# Altium PCB HLK-AX3000-KIT.PcbDoc (part 3 of 3)
Units mm, origin at the board's own origin, x right, y up, seen from the top; angles counter-clockwise.
Board outline 152 x 109 mm, 2 copper layers (Top Layer, Bottom Layer), stack 0.325 mm thick; 227 components, 273 nets, 847 pads, 829 vias.
Unrouted connection lines stored in the file: 195.
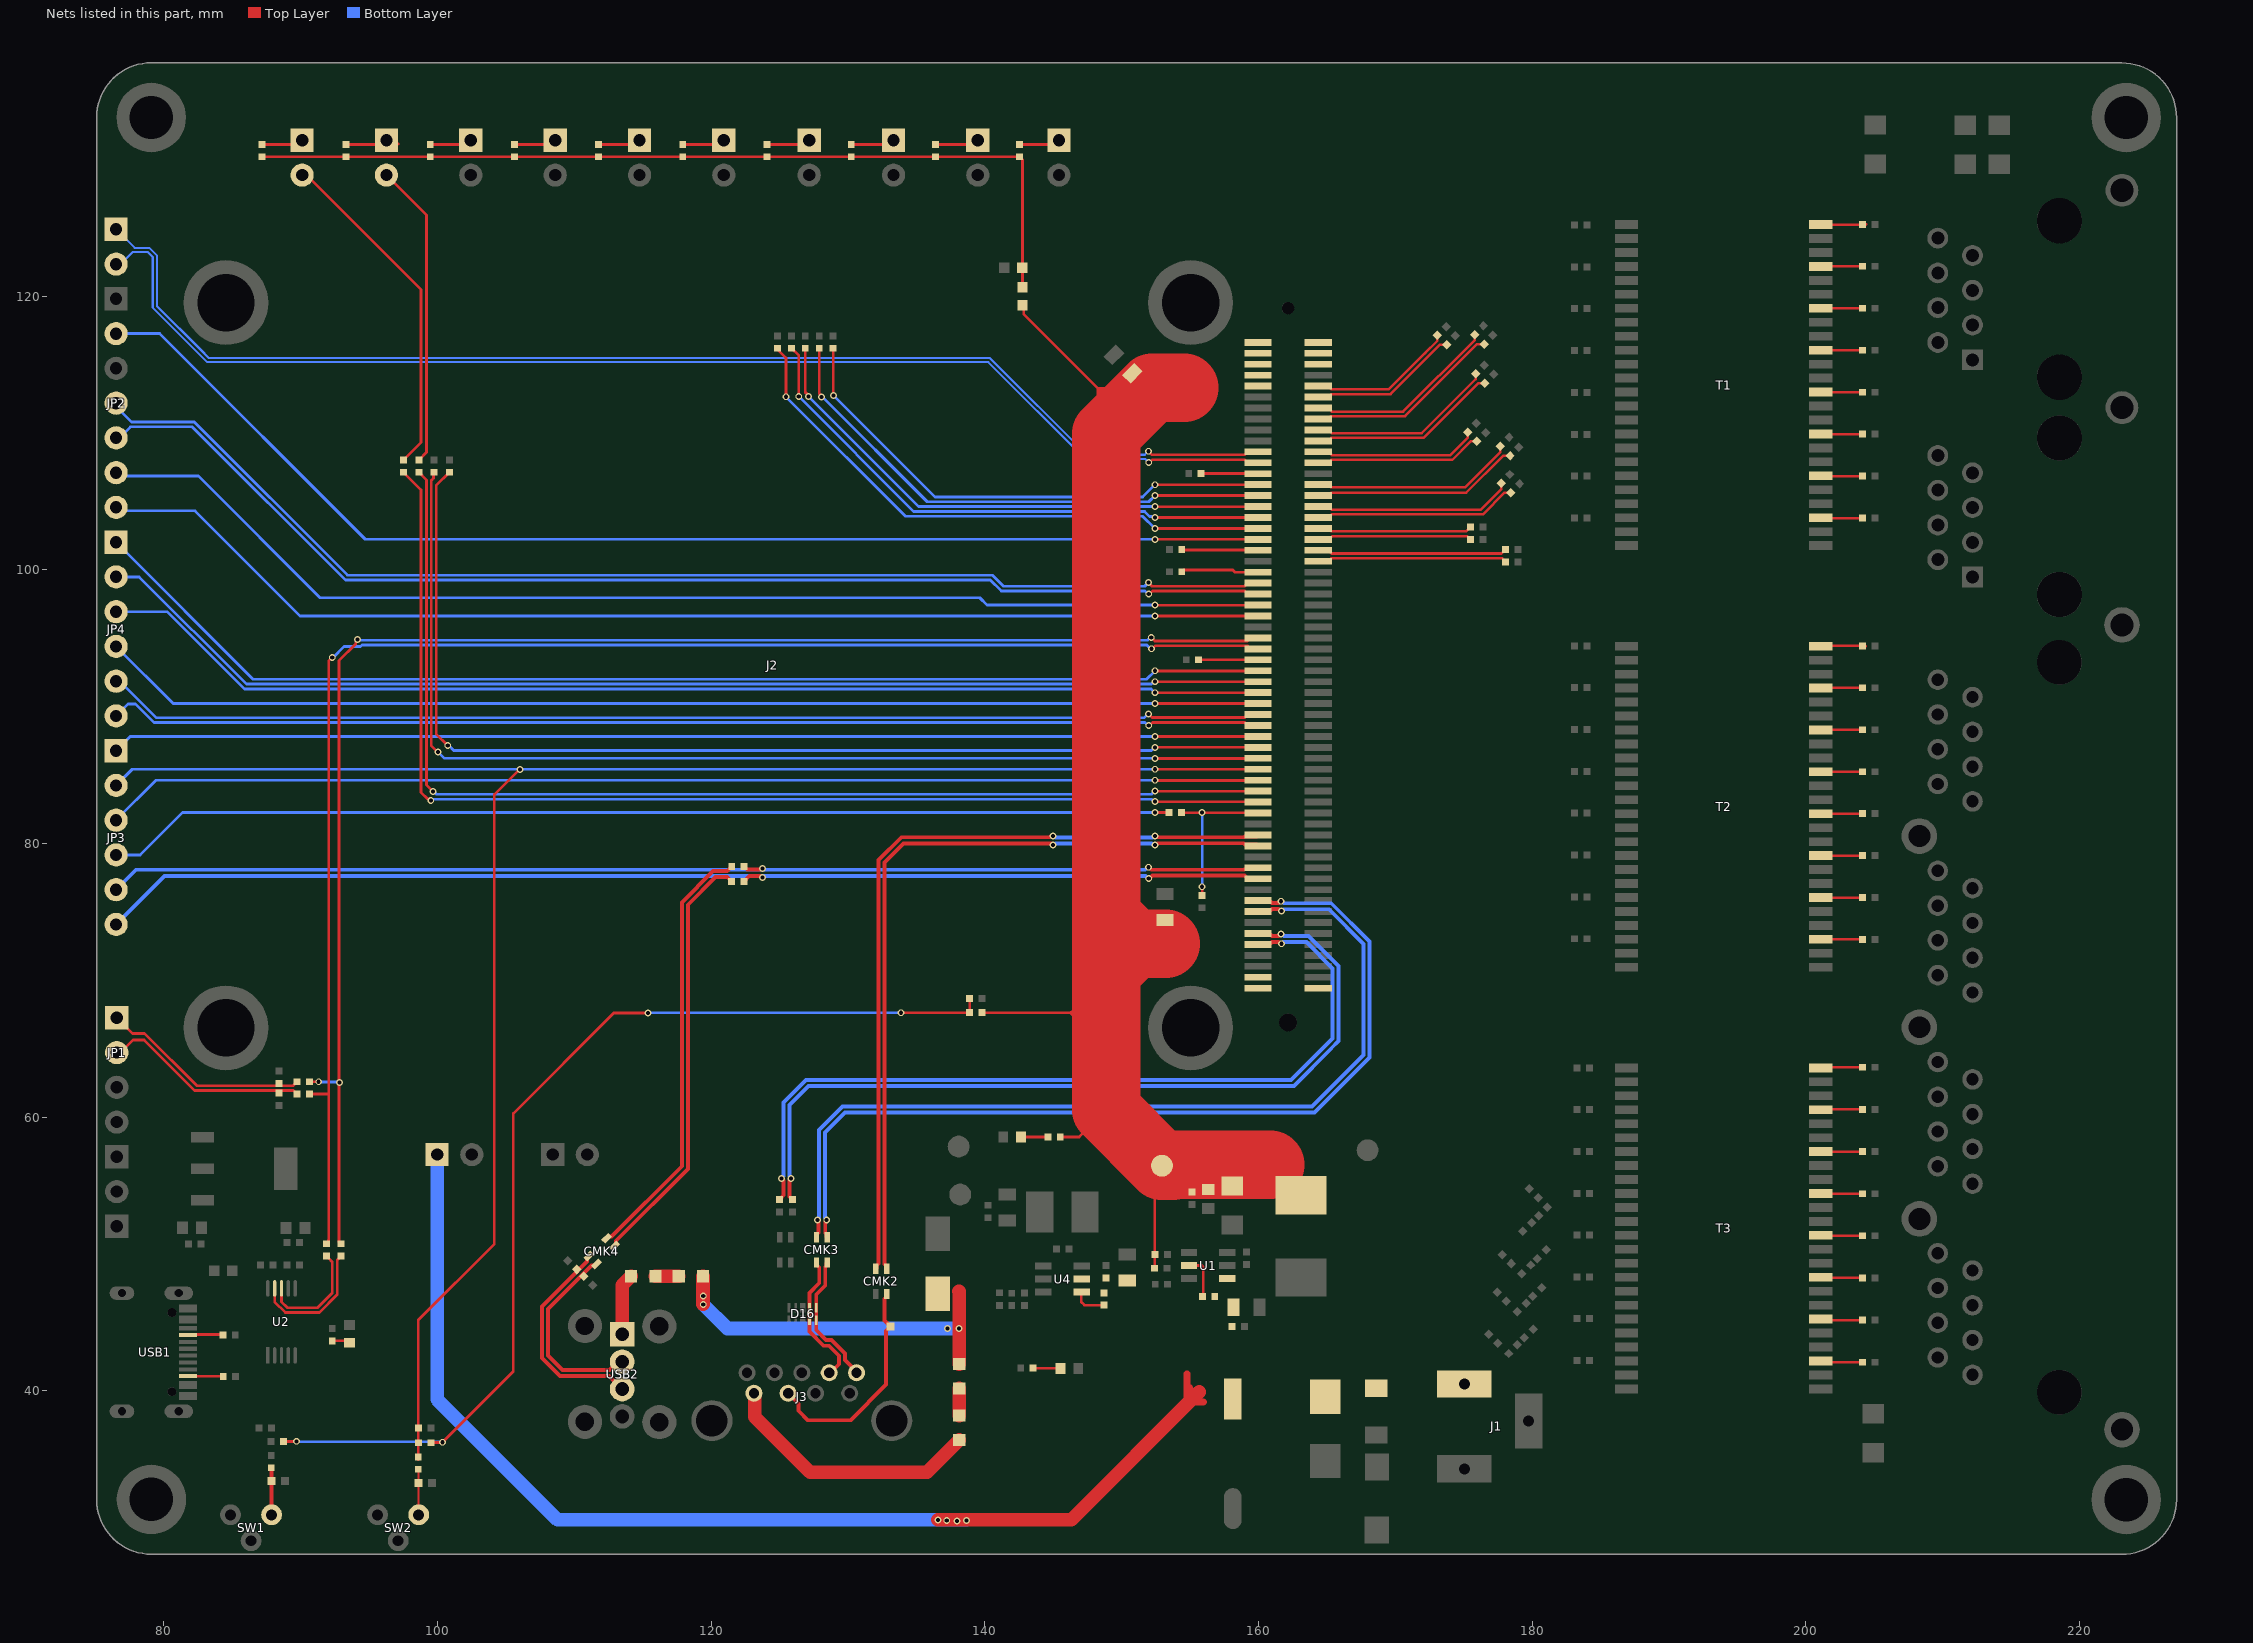
[diagram p3: the nets of this part, all layers, seen from the top]

## Via types
v1: diameter 0.5, hole 0.3, Top Layer to Bottom Layer, tented both sides, 829 vias

## Nets (pads, with @x,y where several pads share a name; then routed paths per layer and width w, separated by ;. In a path a pad name is that pad's centre, name@x,y a point inside that pad or via, vN(x,y) a via of type N, cw(c..) or ccw(c..) an arc to the next point about the centre after c; other vN are vias at no path point) (continued)
NetCMK2_2: CMK2.2 D18.2 J3.2 | length 16.3
  Top Layer w0.283: J3.2@125.623,39.82 126.387,39.055 126.387,38.541 127.085,37.844 130.169,37.844 132.775,40.449 132.775,44.39 D18.2@133.094,44.709 132.672,45.131 132.672,46.727 132.837,46.892 CMK2.2@132.837,47.067
NetCMK3_3: CMK3.3 D16.2 D16.9 J3.6 | length 9.9
  Top Layer w0.283: CMK3.3@127.694,49.378 127.752,49.32 127.752,49.145 127.895,49.002 127.895,47.87 127.178,47.152 D16.2@127.178,46.063 D16.9@127.178,45.163 127.178,44.329 128.218,43.289 128.603,43.289 129.334,42.558 129.334,41.943 128.711,41.32 J3.6@128.623,41.32
NetCMK3_4: CMK3.4 D16.1 D16.10 J3.5 | length 9.8
  Top Layer w0.283: CMK3.4@128.493,49.378 128.435,49.32 128.435,49.145 128.331,49.041 128.331,47.689 127.678,47.036 D16.1@127.678,46.063 D16.10@127.678,45.163 127.678,44.445 128.398,43.725 128.784,43.725 129.77,42.739 129.77,42.252 130.623,41.399 J3.5@130.623,41.32
NetCMK4_1: CMK4.1 D22.2 USB2.3 | length 15.6
  Top Layer w0.283: CMK4.1@111.054,49.84 110.931,49.717 110.931,49.444 107.642,46.155 107.642,42.393 108.342,41.693 108.957,41.078 112.541,41.078 USB2.3@113.49,40.128
NetCMK4_2: CMK4.2 D21.2 USB2.2 | length 14.4
  Top Layer w0.283: CMK4.2@111.62,49.275 111.496,49.151 111.254,49.151 108.077,45.975 108.077,42.574 108.522,42.128 109.138,41.513 112.566,41.513 113.182,42.128 USB2.2@113.49,42.128
NetD4_1: D4.1 R13.1 | length 3
  Top Layer w0.2: R13.1@142.537,131.086 145.112,131.086 D4.1@145.414,131.387
NetD5_1: D5.1 R17.1 | length 3.2
  Top Layer w0.2: R17.1@136.384,131.086 139.186,131.086 D5.1@139.487,131.387
NetD6_1: D6.1 R20.1 | length 3.2
  Top Layer w0.2: R20.1@130.231,131.086 133.021,131.086 D6.1@133.323,131.387
NetD7_2: D7.2 R19.1 SW1.2 | length 3.4
  Top Layer w0.3: R19.1@87.85,34.371 87.862,34.359 87.862,30.952 SW1.2@87.875,30.94
NetD8_1: D8.1 R23.1 | length 3.2
  Top Layer w0.2: R23.1@124.078,131.086 126.857,131.086 D8.1@127.158,131.387
NetD9_1: D9.1 R26.1 | length 3.1
  Top Layer w0.2: R26.1@117.925,131.086 120.624,131.086 D9.1@120.925,131.387
NetD10_1: D10.1 R31.1 | length 3.1
  Top Layer w0.2: R31.1@111.772,131.086 114.459,131.086 D10.1@114.761,131.387
NetD11_1: D11.1 R34.1 | length 3.1
  Top Layer w0.2: R34.1@105.618,131.086 108.295,131.086 D11.1@108.596,131.387
NetD12_2: D12.2 R30.1 SW2.2 | length 3.3
  Top Layer w0.178: SW2.2@98.606,31.001 R30.1@98.606,34.254
NetD13_1: D13.1 R35.1 | length 3.1
  Top Layer w0.2: R35.1@99.465,131.086 102.13,131.086 D13.1@102.432,131.387
NetD14_1: D14.1 R36.1 | length 3.8
  Top Layer w0.2: R36.1@93.312,131.086 97.082,131.086 97.134,131.138
NetD15_1: D15.1 R37.1 | length 3.1
  Top Layer w0.2: R37.1@87.159,131.086 89.801,131.086 D15.1@90.102,131.387
NetD19_2: D19.2 JP1.1 R3.1 | length 15.4
  Top Layer w0.2: JP1.1@76.556,67.259 77.699,66.116 78.588,66.116 82.401,62.303 88.397,62.303 89.453,62.303 R3.1@89.739,62.59
NetD20_2: D20.2 JP1.2 R4.1 | length 15.2
  Top Layer w0.2: JP1.2@76.556,64.719 76.822,64.719 77.736,65.634 78.562,65.634 82.245,61.951 88.4,61.951 89.479,61.951 R4.1@89.739,61.69
NetF1_1: F1.1 J3.1 | length 19.4
  Top Layer w1: J3.1@123.123,39.82 123.171,39.772 123.171,38.105 127.229,34.047 135.772,34.047 F1.1@138.131,36.406
NetF1_2: F1.2 FB1.2 | length 2
  Top Layer w1: F1.2@138.131,38.184 FB1.2@138.131,40.169
NetF2_1: F2.1 J1.1
NetF3_1: F3.1 USB2.1 | length 4.5
  Top Layer w1: USB2.1@113.49,44.128 113.49,47.713 F3.1@114.145,48.368
NetF3_2: F3.2 FB2.2 | length 1.7
  Top Layer w1: F3.2@115.923,48.368 FB2.2@117.625,48.368
NetJ2_9: J2.9 R74.1 | length 10.7
  Top Layer w0.188: J2.9@164.357,113.423 165.107,113.423 165.348,113.181 169.514,113.181 172.171,115.839 173.071,116.739 R74.1@173.071,117.139
NetJ2_11: J2.11 R75.1 | length 11
  Top Layer w0.188: J2.11@164.357,112.623 165.107,112.623 165.325,112.841 169.655,112.841 173.27,116.457 R75.1@173.754,116.457
NetJ2_13: J2.13 R76.1 | length 14.1
  Top Layer w0.188: J2.13@164.357,111.823 165.107,111.823 165.364,111.566 170.565,111.566 175.803,116.803 R76.1@175.803,117.187
NetJ2_15: J2.15 R77.1 | length 14.4
  Top Layer w0.188: J2.15@164.357,111.023 165.107,111.023 165.309,111.225 170.706,111.225 175.971,116.49 R77.1@176.488,116.49
NetJ2_17: J2.17 R78.1 | length 13.7
  Top Layer w0.188: J2.17@164.357,110.223 165.107,110.223 165.349,109.981 171.928,109.981 175.872,113.925 R78.1@175.872,114.329
NetJ2_19: J2.19 R79.1 | length 13.9
  Top Layer w0.188: J2.19@164.357,109.423 165.107,109.423 165.324,109.64 172.069,109.64 176.076,113.648 R79.1@176.54,113.648
NetJ2_21: J2.21 R80.1 | length 12
  Top Layer w0.188: J2.21@164.357,108.623 165.107,108.623 165.352,108.378 174.015,108.378 175.28,109.644 R80.1@175.28,110.068
NetJ2_23: J2.23 R81.1 | length 12.2
  Top Layer w0.188: J2.23@164.357,107.823 165.107,107.823 165.322,108.038 174.156,108.038 175.502,109.384 R81.1@175.958,109.384
NetJ2_26: J2.26 R6.2 | length 4.2
  Top Layer w0.2: R6.2@155.804,107.036 155.81,107.029 159.951,107.029 J2.26@159.957,107.023
NetJ2_27: J2.27 R82.1 | length 14.9
  Top Layer w0.188: J2.27@164.357,106.223 165.107,106.223 165.309,106.021 175.08,106.021 177.667,108.608 R82.1@177.667,109.041
NetJ2_28: J2.28 R7.2 | length 38.2
  Top Layer w0.2: R7.2@128.909,116.193 128.923,116.179 128.923,112.751 v1(128.937,112.737) ; v1@152.42,106.219 152.429,106.21 J2.28@160.173,106.21
  Bottom Layer w0.2: v1(128.937,112.737) 136.35,105.324 151.531,105.324 v1(152.426,106.219)
NetJ2_29: J2.29 R83.1 | length 15.2
  Top Layer w0.188: J2.29@164.357,105.423 165.107,105.423 165.314,105.63 175.17,105.63 177.869,108.329 R83.1@178.377,108.329
NetJ2_30: J2.30 R8.2 | length 39.1
  Top Layer w0.2: R8.2@127.892,116.193 127.892,112.9 128.071,112.72 v1(128.071,112.639) ; v1(152.426,105.423) J2.30@160.16,105.423
  Bottom Layer w0.2: v1(128.071,112.639) 128.12,112.639 135.788,104.971 151.974,104.971 v1(152.426,105.423)
NetJ2_31: J2.31 R84.1 | length 14.5
  Top Layer w0.188: J2.31@164.357,104.623 165.107,104.623 165.337,104.393 176.246,104.393 177.728,105.875 R84.1@177.728,106.328
NetJ2_32: J2.32 R11.2 | length 40
  Top Layer w0.2: R11.2@126.875,116.193 126.875,112.975 127.108,112.742 v1(127.108,112.66) ; v1@152.42,104.619 152.429,104.61 J2.32@160.173,104.61
  Bottom Layer w0.2: v1(127.108,112.66) 135.15,104.619 v1(152.426,104.619)
NetJ2_33: J2.33 R85.1 | length 14.8
  Top Layer w0.188: J2.33@164.357,103.823 165.107,103.823 165.336,104.053 176.387,104.053 177.972,105.638 R85.1@178.435,105.638
NetJ2_34: J2.34 R14.2 | length 41.2
  Top Layer w0.2: R14.2@125.858,116.193 126.401,115.65 v1(126.401,112.661) ; v1(152.426,103.823) J2.34@160.16,103.823
  Bottom Layer w0.2: v1(126.401,112.661) 126.401,112.657 134.792,104.266 151.677,104.266 152.046,103.897 152.159,103.897 152.176,103.881 152.369,103.881 v1(152.426,103.823)
NetJ2_35: J2.35 R86.1 | length 11.4
  Top Layer w0.188: J2.35@164.357,103.023 165.107,103.023 165.325,102.805 175.166,102.805 R86.1@175.493,103.132
NetJ2_36: J2.36 R15.2 | length 42.2
  Top Layer w0.2: R15.2@124.841,116.103 125.457,115.487 v1(125.457,112.643) ; v1@152.426,103.01 J2.36@159.97,103.01
  Bottom Layer w0.2: v1(125.457,112.643) 134.186,103.914 151.531,103.914 v1(152.426,103.019)
NetJ2_37: J2.37 R87.1 | length 11.3
  Top Layer w0.188: J2.37@164.357,102.223 164.513,102.379 165.328,102.379 165.414,102.465 175.238,102.465 R87.1@175.493,102.21
NetJ2_39: J2.39 R88.1 | length 13.9
  Top Layer w0.188: J2.39@164.357,101.423 165.107,101.423 165.34,101.19 177.75,101.19 177.9,101.339 R88.1@178.056,101.495
NetJ2_40: J2.40 R18.2 | length 5.6
  Top Layer w0.2: R18.2@154.393,101.449 159.931,101.449 J2.40@159.957,101.423
NetJ2_41: J2.41 R89.1 | length 13.9
  Top Layer w0.188: J2.41@164.357,100.623 165.107,100.623 165.333,100.849 177.783,100.849 177.9,100.733 R89.1@178.056,100.577
NetJ2_44: J2.44 R21.2 | length 5.7
  Top Layer w0.2: R21.2@154.393,99.855 154.519,99.98 158.112,99.98 158.269,99.823 J2.44@159.957,99.823
NetJ2_60: J2.60 R90.2 | length 4.3
  Top Layer w0.2: R90.2@155.612,93.425 159.955,93.425 J2.60@159.957,93.423
NetJ2_76: J2.76 R22.2 | length 80.2
  Top Layer w0.2: v1(100.743,87.159) 99.9,88.002 99.9,106.16 R22.2@100.867,107.127 ; v1(152.426,87.023) J2.76@159.957,87.023
  Bottom Layer w0.2: v1(100.743,87.159) 100.824,87.159 101.183,86.8 152.159,86.8 152.382,87.023 v1(152.426,87.023)
NetJ2_78: J2.78 R24.2 | length 80.9
  Top Layer w0.2: R24.2@99.751,107.127 99.709,107.086 99.709,106.694 99.548,106.533 99.548,87.132 99.989,86.69 v1(100.025,86.69) ; v1(152.426,86.219) 152.435,86.21 J2.78@159.97,86.21
  Bottom Layer w0.2: v1(100.025,86.69) 100.497,86.219 v1(152.426,86.219)
NetJ2_84: J2.84 R72.2 | length 84.4
  Top Layer w0.2: R72.2@98.634,107.127 99.195,106.567 99.195,84.279 v1(99.672,83.802) ; v1(152.426,83.823) J2.84@160.16,83.823
  Bottom Layer w0.2: v1(99.672,83.802) 99.729,83.802 99.939,83.592 152.159,83.592 152.391,83.823 v1(152.426,83.823)
NetJ2_86: J2.86 R73.2 | length 85.5
  Top Layer w0.2: R73.2@97.514,107.123 97.522,107.123 97.668,106.977 97.668,106.969 98.795,105.842 98.795,83.725 99.252,83.269 99.304,83.269 99.426,83.147 v1(99.507,83.147) ; v1(152.426,83.055) 152.435,83.046 159.934,83.046 J2.86@159.957,83.023
  Bottom Layer w0.2: v1(99.507,83.147) 99.589,83.147 99.681,83.239 152.161,83.239 152.345,83.055 v1(152.426,83.055)
NetJP3_4: JP3.4 R25.1 | length 78.2
  Top Layer w0.2: v1(152.426,82.26) 152.432,82.265 153.461,82.265 R25.1@153.467,82.271
  Bottom Layer w0.2: JP3.4@76.508,79.161 78.268,79.161 81.367,82.26 v1(152.426,82.26)
NetLED1_1: LED1.1 R94.1 | length 2
  Top Layer w0.2: LED1.1@142.638,58.556 142.642,58.551 R94.1@144.603,58.551
NetLED2_1: LED2.1 R95.1 | length 2
  Top Layer w0.2: R95.1@143.521,41.656 145.502,41.656 LED2.1@145.527,41.631
NetLED3_1: LED3.1 R98.1 | length 1.3
  Top Layer w0.2: R98.1@92.304,43.652 93.429,43.652 LED3.1@93.571,43.51
NetR1_2: R1.2 U1.2 | length 3.3
  Top Layer w0.2: U1.2@154.918,49.155 155.851,49.155 155.968,49.038 155.968,46.966 R1.2@155.904,46.902
NetR9_2: R9.2 U4.4 | length 2.5
  Top Layer w0.2: U4.4@147.073,47.213 147.035,47.175 147.035,46.511 147.287,46.259 R9.2@148.711,46.259
NetR27_2: R27.2 USB1.A5 | length 2.6
  Top Layer w0.2: USB1.A5@81.763,44.07 81.799,44.107 84.299,44.107 R27.2@84.316,44.09
NetR28_2: R28.2 USB1.B5 | length 2.6
  Top Layer w0.2: USB1.B5@81.763,41.07 81.777,41.056 84.327,41.056 R28.2@84.341,41.042
NetR38_2: R38.2 T1.48 | length 3.3
  Top Layer w0.181: T1.48@201.087,125.229 204.391,125.229 204.413,125.251
NetR39_2: R39.2 T1.45 | length 3.1
  Top Layer w0.181: T1.45@201.087,122.169 201.098,122.18 R39.2@204.144,122.18
NetR40_2: R40.2 T1.42 | length 3.1
  Top Layer w0.181: T1.42@201.087,119.109 201.091,119.113 R40.2@204.144,119.113
NetR41_2: R41.2 T1.39 | length 3.1
  Top Layer w0.181: T1.39@201.087,116.049 201.09,116.046 R41.2@204.144,116.046
NetR42_2: R42.2 T1.36 | length 3.1
  Top Layer w0.181: T1.36@201.087,112.989 201.097,112.979 R42.2@204.144,112.979
NetR43_2: R43.2 T1.33 | length 3.1
  Top Layer w0.181: T1.33@201.087,109.929 201.104,109.912 R43.2@204.144,109.912
NetR45_2: R45.2 T1.30 | length 3.1
  Top Layer w0.181: T1.30@201.087,106.869 201.111,106.845 R45.2@204.144,106.845
NetR46_2: R46.2 T1.27 | length 3.1
  Top Layer w0.181: T1.27@201.087,103.809 201.118,103.778 R46.2@204.144,103.778
NetR47_2: R47.2 T2.48 | length 3.3
  Top Layer w0.181: T2.48@201.087,94.414 201.114,94.441 204.117,94.441 204.144,94.414 R47.2@204.391,94.414
NetR48_2: R48.2 T2.45 | length 3.1
  Top Layer w0.181: T2.45@201.087,91.354 201.109,91.376 R48.2@204.144,91.376
NetR49_2: R49.2 T2.42 | length 3.1
  Top Layer w0.181: T2.42@201.087,88.294 201.103,88.31 204.132,88.31 R49.2@204.144,88.298
NetR50_2: R50.2 T2.39 | length 3.1
  Top Layer w0.181: T2.39@201.087,85.234 201.098,85.245 R50.2@204.144,85.245
NetR51_2: R51.2 T2.36 | length 3.1
  Top Layer w0.181: T2.36@201.087,82.174 201.092,82.179 204.129,82.179 R51.2@204.144,82.164
NetR52_2: R52.2 T2.33 | length 6.1
  Top Layer w0.181: T2.33@201.088,79.114 R52.2@204.144,79.114 ; T2.33@201.104,79.097 R52.2@204.144,79.097
NetR53_2: R53.2 T2.30 | length 3.1
  Top Layer w0.181: T2.30@201.087,76.054 201.093,76.048 204.126,76.048 R53.2@204.144,76.03
NetR54_2: R54.2 T2.27 | length 3.1
  Top Layer w0.181: T2.27@201.087,72.994 201.099,72.983 R54.2@204.144,72.983
NetR55_2: R55.2 T3.48 | length 3.1
  Top Layer w0.181: T3.48@201.087,63.599 201.134,63.646 R55.2@204.144,63.646
NetR56_2: R56.2 T3.45 | length 3.1
  Top Layer w0.181: T3.45@201.087,60.539 201.114,60.566 R56.2@204.144,60.566
NetR57_2: R57.2 T3.42 | length 3.1
  Top Layer w0.181: T3.42@201.087,57.479 201.094,57.486 R57.2@204.144,57.486
NetR58_2: R58.2 T3.39 | length 3.1
  Top Layer w0.181: T3.39@201.087,54.419 201.1,54.406 R58.2@204.144,54.406
NetR59_2: R59.2 T3.36 | length 3.1
  Top Layer w0.181: T3.36@201.087,51.359 201.12,51.326 R59.2@204.144,51.326
NetR60_2: R60.2 T3.33 | length 3.1
  Top Layer w0.181: T3.33@201.087,48.299 201.14,48.246 R60.2@204.144,48.246
NetR61_2: R61.2 T3.30 | length 3.1
  Top Layer w0.181: T3.30@201.087,45.239 201.16,45.166 R61.2@204.144,45.166
NetR62_2: R62.2 T3.27 | length 3.1
  Top Layer w0.181: T3.27@201.087,42.179 201.18,42.086 R62.2@204.144,42.086
PCIE_CKN: J2.98 JP3.5 R92.2 | length 85.7
  Top Layer w0.283: R92.2@122.404,78.313 122.631,78.086 123.614,78.086 123.69,78.163 v1(123.749,78.163) ; v1(151.953,78.26) 152.011,78.26 152.19,78.082 158.933,78.082 158.966,78.115 159.849,78.115 J2.98@159.957,78.223
  Bottom Layer w0.283: JP3.5@76.508,76.621 77.963,78.076 151.71,78.076 151.894,78.26 v1(151.953,78.26)
PCIE_CKP: J2.100 JP3.6 R93.2 | length 86.7
  Top Layer w0.283: R93.2@122.394,77.224 122.78,77.611 123.59,77.611 123.69,77.51 v1(123.749,77.51) ; v1(151.975,77.431) 152.033,77.431 152.249,77.646 158.984,77.646 159.207,77.423 J2.100@159.957,77.423
  Bottom Layer w0.283: JP3.6@76.508,74.081 80.045,77.619 151.728,77.619 151.916,77.431 v1(151.975,77.431)
PCIE_PERESET_N: J2.82 JP3.3 | length 84.9
  Top Layer w0.2: v1@152.42,84.619 152.429,84.61 J2.82@160.173,84.61
  Bottom Layer w0.2: JP3.3@76.508,81.701 79.426,84.619 v1(152.426,84.619)
PWM0: J2.38 JP2.2 | length 89.7
  Top Layer w0.2: v1(152.426,102.223) J2.38@159.957,102.223
  Bottom Layer w0.2: JP2.2@76.508,117.261 79.691,117.261 94.719,102.233 152.417,102.233 v1(152.426,102.223)
RXD: R33.2 U2.8 | length 8.2
  Top Layer w0.2: U2.8@88.595,47.484 88.595,46.498 89.021,46.072 91.215,46.072 92.304,47.161 92.304,49.42 92.026,49.698 R33.2@91.876,49.848
SMI_MDC: J2.22 JP7.1 | length 92.7
  Top Layer w0.2: v1(151.953,108.66) 151.958,108.66 152.22,108.399 158.982,108.399 159.207,108.623 J2.22@159.957,108.623
  Bottom Layer w0.152: JP7.1@76.508,124.881 77.86,123.529 78.943,123.529 79.491,122.982 79.491,119.282 82.71,116.063 83.293,115.48 140.368,115.48 147.441,108.407 151.69,108.407 151.942,108.66 v1(151.953,108.66)
SMI_MDIO: J2.24 JP7.2 | length 92.5
  Top Layer w0.2: v1(151.975,107.831) 152.026,107.831 152.242,108.046 158.984,108.046 159.207,107.823 J2.24@159.957,107.823
  Bottom Layer w0.152: JP7.2@76.508,122.341 76.853,122.341 77.736,123.224 78.817,123.224 79.186,122.855 79.186,119.156 83.167,115.175 89.999,115.175 90.003,115.171 140.246,115.171 147.314,108.103 151.703,108.103 v1(151.975,107.831)
SPI1_CLK: J2.50 JP2.6 | length 87.4
  Top Layer w0.2: v1(152.426,97.419) 152.435,97.41 J2.50@159.97,97.41
  Bottom Layer w0.2: JP2.6@76.508,106.851 82.524,106.851 91.415,97.96 139.624,97.96 140.165,97.419 v1(152.426,97.419)
SPI1_CS: J2.52 JP2.7 | length 86.6
  Top Layer w0.2: v1(152.426,96.623) J2.52@159.957,96.623
  Bottom Layer w0.2: JP2.7@76.508,104.311 82.27,104.311 89.958,96.623 v1(152.426,96.623)
SPI1_MISO: J2.46 JP2.4 | length 89.2
  Top Layer w0.2: v1(151.953,99.06) 151.958,99.06 152.22,98.799 158.982,98.799 159.207,99.023 J2.46@159.957,99.023
  Bottom Layer w0.2: JP2.4@76.508,111.931 77.636,110.803 82.222,110.803 93.421,99.605 140.541,99.605 141.35,98.796 151.685,98.796 151.95,99.06 v1(151.953,99.06)
SPI1_MOSI: J2.48 JP2.5 | length 89.1
  Top Layer w0.2: v1(151.975,98.231) 152.026,98.231 152.242,98.446 158.984,98.446 159.207,98.223 J2.48@159.957,98.223
  Bottom Layer w0.2: JP2.5@76.508,109.391 77.567,110.451 82.076,110.451 93.275,99.252 140.395,99.252 141.204,98.444 151.708,98.444 151.921,98.231 v1(151.975,98.231)
SPI2_CLK: J2.68 JP4.4 | length 85.2
  Top Layer w0.2: v1(152.426,90.223) J2.68@159.957,90.223
  Bottom Layer w0.2: JP4.4@76.508,94.401 80.685,90.223 v1(152.426,90.223)
SPI2_CS: J2.62 JP4.1 | length 87.9
  Top Layer w0.2: v1(152.426,92.619) 152.435,92.61 J2.62@159.97,92.61
  Bottom Layer w0.2: JP4.1@76.508,102.021 86.528,92.001 151.808,92.001 v1(152.426,92.619)
SPI2_HOLD: J2.64 JP4.2 | length 86.8
  Top Layer w0.2: v1(152.426,91.823) J2.64@159.957,91.823
  Bottom Layer w0.2: JP4.2@76.508,99.481 78.197,99.481 86.03,91.648 152.17,91.648 152.345,91.823 v1(152.426,91.823)
SPI2_MISO: J2.70 JP4.5 | length 84.9
  Top Layer w0.2: v1(151.953,89.46) 151.958,89.46 152.22,89.199 158.982,89.199 159.207,89.423 J2.70@159.957,89.423
  Bottom Layer w0.2: JP4.5@76.508,91.861 76.77,91.861 79.438,89.193 151.653,89.193 151.921,89.46 v1(151.953,89.46)
SPI2_MOSI: J2.72 JP4.6 | length 84.6
  Top Layer w0.2: v1(151.975,88.631) 152.026,88.631 152.242,88.846 158.984,88.846 159.207,88.623 J2.72@159.957,88.623
  Bottom Layer w0.2: JP4.6@76.508,89.321 77.387,90.2 77.932,90.2 79.292,88.84 151.708,88.84 151.917,88.631 v1(151.975,88.631)
SPI2_WP: J2.66 JP4.3 | length 85.9
  Top Layer w0.2: v1(152.426,91.019) 152.435,91.01 J2.66@159.97,91.01
  Bottom Layer w0.2: JP4.3@76.508,96.941 80.239,96.941 85.884,91.296 152.149,91.296 v1(152.426,91.019)
SSUSB_RXN: CMK3.1 J2.104 | length 68.6
  Top Layer w0.283: v1@128.463,52.486 128.463,52.428 128.33,52.294 128.33,51.567 128.435,51.462 128.435,51.287 CMK3.1@128.493,51.229 ; J2.104@159.207,75.823 J2.104@159.957,75.823 160.065,75.715 160.915,75.715 160.981,75.648 161.462,75.648 161.594,75.78 v1(161.652,75.78)
  Bottom Layer w0.283: v1(128.438,52.486) 128.438,52.545 128.307,52.676 128.307,58.874 129.77,60.336 164.097,60.336 168.108,64.347 168.108,72.836 165.314,75.63 161.861,75.63 161.711,75.78 v1(161.652,75.78)
SSUSB_RXP: CMK3.2 J2.106 | length 68
  Top Layer w0.283: CMK3.2@127.694,51.229 127.694,51.403 127.853,51.563 127.853,52.361 127.787,52.428 v1@127.787,52.486 ; v1@127.745,52.462 v1@127.828,52.545 ; J2.106@159.207,75.023 159.315,75.131 160.9,75.131 160.981,75.212 161.47,75.212 161.607,75.075 v1(161.666,75.075)
  Bottom Layer w0.283: v1(127.761,52.486) 127.761,52.545 127.871,52.655 127.871,59.054 129.589,60.772 163.917,60.772 167.672,64.527 167.672,72.655 165.138,75.19 161.839,75.19 161.724,75.075 v1(161.666,75.075)
SSUSB_TXN: C33.2 J2.110 | length 62.3
  Top Layer w0.283: v1@125.824,55.476 125.718,55.37 125.718,54.201 C33.2@125.933,53.986 ; J2.110@159.207,73.423 J2.110@159.957,73.423 160.065,73.315 160.915,73.315 160.981,73.248 161.462,73.248 161.594,73.38 v1(161.652,73.38)
  Bottom Layer w0.283: v1(125.824,55.51) 125.824,55.569 125.714,55.679 125.714,60.89 127.102,62.278 162.578,62.278 165.31,65.01 165.31,65.033 165.844,65.567 165.844,71.055 163.665,73.235 161.856,73.235 161.711,73.38 v1(161.652,73.38)
SSUSB_TXP: C32.2 J2.112 | length 61.7
  Top Layer w0.283: C32.2@124.975,53.986 125.088,54.099 125.282,54.293 125.282,55.283 125.28,55.285 125.28,55.378 v1(125.147,55.51) ; J2.112@159.207,72.623 159.315,72.731 160.9,72.731 160.981,72.812 161.47,72.812 161.607,72.675 v1(161.666,72.675)
  Bottom Layer w0.283: v1(125.147,55.51) 125.147,55.569 125.272,55.694 125.272,61.065 126.921,62.714 162.375,62.714 165.408,65.747 165.408,70.875 163.496,72.786 161.836,72.786 161.724,72.675 v1(161.666,72.675)
SYS_WATCHDOG: J2.74 JP3.1 | length 83.9
  Top Layer w0.2: v1(152.426,87.819) 152.435,87.809 J2.74@159.97,87.809
  Bottom Layer w0.2: JP3.1@76.508,86.781 77.541,87.814 85.597,87.814 93.655,87.813 93.66,87.819 v1(152.426,87.819)
SYSRSTB: C30.2 J2.80 JP3.2 R29.2 R30.2 | length 137.5
  Top Layer w0.2: R30.2@98.589,34.954 98.589,45.183 104.15,50.743 104.15,83.586 105.979,85.415 v1(106.016,85.415) ; v1(152.426,85.423) J2.80@159.957,85.423
  Bottom Layer w0.2: JP3.2@76.508,84.241 77.69,85.423 106.008,85.423 v1(106.016,85.415) 106.02,85.419 152.422,85.419 v1(152.426,85.423)
TXD: R32.2 U2.9 | length 9.3
  Top Layer w0.2: U2.9@88.095,47.484 88.095,46.499 88.875,45.72 91.361,45.72 92.673,47.032 92.673,49.55 R32.2@92.946,49.823
U_USB_DM_P0: CMK2.3 J2.94 | length 57.9
  Top Layer w0.283: CMK2.3@132.837,48.917 132.779,48.975 132.779,49.151 132.674,49.255 132.674,55.397 132.674,78.617 134.061,80.004 144.821,80.004 144.931,79.894 v1(144.99,79.894) ; v1@152.444,79.945 152.454,79.936 152.544,79.936 152.625,80.016 158.913,80.016 158.997,79.931 159.849,79.931 J2.94@159.957,79.823
  Bottom Layer w0.283: v1(144.99,79.894) 145.048,79.894 145.15,79.996 152.19,79.996 152.25,79.936 152.403,79.936 v1(152.444,79.894)
U_USB_DP_P0: CMK2.4 J2.92 | length 58.7
  Top Layer w0.283: CMK2.4@132.037,48.917 132.096,48.976 132.096,49.15 132.239,49.293 132.239,78.798 133.894,80.453 144.735,80.453 144.795,80.513 144.897,80.513 v1@144.99,80.606 ; v1@152.432,80.606 152.491,80.606 152.644,80.452 158.933,80.452 158.996,80.515 159.849,80.515 J2.92@159.957,80.623
  Bottom Layer w0.283: v1@144.99,80.606 144.997,80.606 145.171,80.432 152.25,80.432 v1@152.432,80.613
  other v1: 144.99,80.555 152.432,80.555
UART0_RXD: J2.58 R4.2 R33.1 | length 113
  Top Layer w0.2: R4.2@90.639,61.69 91.987,61.69 92.045,61.747 ; R33.1@91.876,50.748 92.026,50.898 92.026,50.996 92.045,51.015 92.045,61.747 ; v1(92.304,93.599) 92.304,93.591 92.045,93.332 92.045,61.747 ; v1(152.177,94.231) 152.229,94.231 152.444,94.446 159.186,94.446 159.41,94.223 J2.58@160.16,94.223
  Bottom Layer w0.2: v1(92.304,93.599) 92.379,93.599 93.172,94.392 94.366,94.392 94.472,94.498 151.829,94.498 152.096,94.231 v1(152.177,94.231)
UART0_TXD: J2.56 R3.2 R32.1 | length 113.3
  Top Layer w0.2: R3.2@90.639,62.59 90.641,62.588 91.311,62.588 v1(91.313,62.586) ; R32.1@92.946,50.748 92.796,50.898 92.796,51.013 92.794,51.015 92.794,93.361 94.031,94.598 94.031,94.686 94.158,94.813 v1(94.158,94.894) ; v1(152.155,95.06) 152.161,95.06 152.422,94.799 159.185,94.799 159.41,95.023 J2.56@160.16,95.023
  Bottom Layer w0.2: v1(91.313,62.586) 91.338,62.56 92.812,62.56 v1(92.837,62.535) ; v1(94.158,94.894) 94.192,94.861 151.888,94.861 152.088,95.06 v1(152.155,95.06)
USB2_1_DM: CMK4.3 R93.1 | length 31.3
  Top Layer w0.283: CMK4.3@112.928,50.583 113.052,50.707 113.052,50.964 118.291,56.204 118.291,75.518 120.319,77.546 121.173,77.546 R93.1@121.494,77.224
USB2_1_DP: CMK4.4 R92.1 | length 31.7
  Top Layer w0.283: CMK4.4@112.363,51.149 112.486,51.272 112.715,51.272 117.856,56.413 117.856,75.698 120.139,77.981 121.173,77.981 R92.1@121.504,78.313
USB_5V: D3.2 FB1.1 FB2.1 | length 27.4
  Top Layer w1: v1@119.403,46.317 FB2.1@119.403,48.368 ; 138.106,47.27 138.119,47.257 138.119,45.274 138.131,45.262 FB1.1@138.131,41.947
  Bottom Layer w1: v1(119.418,46.916) v1(119.418,46.317) 121.183,44.552 v1(137.262,44.552) v1@138.119,44.552
  other v1: 138.119,44.563
USB_VBUS: J2.88 R25.2 R63.2 | length 11.7
  Top Layer w0.2: R25.2@154.367,82.271 154.39,82.247 159.933,82.247 J2.88@159.957,82.223 ; R63.2@155.873,76.205 155.877,76.208 155.877,76.832 v1(155.88,76.835)
  Bottom Layer w0.2: v1(155.88,76.835) v1(155.88,82.271)
VCC: C2.2 C6.2 C8.2 C9.2 C10.1 C28.1 J2.1 J2.2 J2.3 J2.4 J2.5 J2.6 J2.8 J2.10 J2.118 J2.119 J2.120 L1.2 R2.1 R94.2 R97.2 R99.1 TP4.1 | length 113.5
  Top Layer w0.2: R97.2@139.788,67.644 139.806,67.626 146.352,67.626 148.763,67.626 148.865,67.728 ; R99.1@142.748,119.34 142.836,119.251 142.836,118.69 148.303,113.223 149.51,112.016 ; R94.2@145.503,58.551 146.891,58.551 148.865,60.525 ; R2.1@152.408,48.956 152.408,55.122 TP4.1@153.735,56.45
  Top Layer w0.3: 146.334,67.599 146.944,66.989 ; 146.347,67.622 146.352,67.626 146.957,68.231 ; 148.289,112.402 148.289,113.215 ; 148.303,113.223 149.115,113.223
  Top Layer w0.5: 150.47,69.063 151.917,70.51 ; 150.8,75.971 152.248,74.524
  Top Layer w5: 153.213,72.681 148.865,72.681 ; 154.566,113.295 152.216,113.295 148.865,109.945 148.865,72.681 ; 160.876,56.512 153.797,56.512 153.735,56.45 TP4.1@152.94,56.45 148.865,60.525 148.865,67.728 148.865,72.681
VCC_LED: R13.2 R17.2 R20.2 R23.2 R26.2 R31.2 R34.2 R35.2 R36.2 R37.2 R99.2 R100.1 | length 65
  Top Layer w0.2: R37.2@87.159,130.186 R36.2@93.312,130.186 R35.2@99.465,130.186 R34.2@105.618,130.186 R31.2@111.772,130.186 R26.2@117.925,130.186 R23.2@124.078,130.186 R20.2@130.231,130.186 R17.2@136.384,130.186 R13.2@142.537,130.186 142.748,129.975 R99.2@142.748,120.64
VDDIO: R16.1 R29.1 R96.1 R97.1 | length 76.1
  Top Layer w0.2: R16.1@88.732,36.285 88.743,36.296 89.682,36.296 v1(89.694,36.308) ; R29.1@99.513,36.2 99.532,36.22 v1@100.331,36.22 ; v1(100.351,36.24) 105.537,41.426 105.537,60.274 112.878,67.615 v1(115.392,67.615) ; v1(133.865,67.626) 133.874,67.635 138.879,67.635 R97.1@138.888,67.644 ; R97.1@138.888,67.635 R97.1@138.888,67.644 ; R96.1@138.888,68.66 R97.1@138.888,67.644
  Bottom Layer w0.2: v1(89.694,36.308) 89.728,36.274 v1@100.317,36.274 ; v1@100.331,36.274 v1@100.317,36.274 ; v1(100.351,36.24) v1@100.317,36.274 ; v1(115.392,67.615) 115.401,67.623 133.861,67.623 v1(133.865,67.626)
VIN: C3.1 C4.2 C5.1 C18.2 C19.1 D1.2 JP5.1 R1.1 R9.1 U1.4 U4.5 | length 86.5
  Top Layer w0.5: 154.762,39.192 154.762,41.25 ; 154.95,39.644 154.95,40.253 ; 155.367,39.179 155.977,39.179
  Top Layer w1: v1(136.576,30.568) 146.311,30.568 155.658,39.915
  Bottom Layer w1: JP5.1@99.969,57.265 99.969,39.376 108.777,30.568 v1(136.576,30.568) 137.211,30.568 137.971,30.568 v1@138.659,30.568
  other v1: 137.971,30.479 137.211,30.531 138.659,30.531
WF2G_LED: D15.2 R73.1 | length 25.1
  Top Layer w0.2: D15.2@90.102,128.847 90.432,128.847 98.795,120.484 98.795,109.305 R73.1@97.518,108.027
WF5G_LED: D14.2 R72.1 | length 22.3
  Top Layer w0.2: D14.2@96.267,128.847 99.195,125.919 99.195,108.588 R72.1@98.634,108.027
pads on no net: J2.E RJ1. RJ2. RJ3. SW1.0 SW2.0 U2.4 U2.5 U2.6 USB1. USB1.A8 USB1.B8 USB2.G

## Polygon pours and split planes (outlines as drawn)
GND on Top Layer "NONET_L02_P-001" (solid, remove dead copper, pour order 1): 75.09,28.053 227.413,28.053 227.413,137.053 75.089,137.053
GND_EARTH on Top Layer "NONET_L02_P-001" (solid, remove dead copper, pour order 0): 207.83,127.732 207.83,131.304 219.056,131.304 220.606,132.853 220.606,137.654 225.254,137.654 227.514,135.393 227.413,135.292 227.413,127.732
GND on Bottom Layer "NONET_L02_P-001" (solid, remove dead copper, pour order 2): 75.09,28.053 227.413,28.053 227.413,137.053 75.089,137.053

## Keep-outs
Keep-Out Layer:
  lines w0.001: 75.089,32.059 75.089,133.053 ; 79.089,137.053 223.092,137.053 ; 79.095,28.053 223.093,28.053 ; 227.093,32.053 227.093,133.047
  lines w0.02: 75.089,133.053 cw(c79.089,133.053) 79.089,137.053 ; 75.09,32.058 ccw(c79.09,32.058) 79.09,28.058 ; 223.092,137.048 cw(c223.092,133.048) 227.092,133.048 ; 223.093,28.053 ccw(c223.093,32.053) 227.093,32.053

## Other copper
Top Layer:
  region net +5V: 139.126,54.589 139.126,53.15 139.415,52.861 139.085,52.531 137.129,52.531 136.926,52.734 136.926,53.979 137.586,54.639
  region net GND: 130.018,38.735 131.156,39.873 130.979,40.049 130.512,40.049 129.992,39.529 129.992,38.813
  region net USB_5V: 138.64,48.068 137.878,48.83 136.1,48.83 135.439,48.17 135.439,45.579 137.696,43.322 138.64,44.266
  region net VCC: 159.221,54.64 161.222,52.639 165.31,52.639 165.462,52.792 165.462,56.756 163.228,58.99 159.221,58.99
  region net VIN: 146.27,48.415 146.27,47.824 146.371,47.723 147.799,47.723 148.012,47.509 148.012,47.214 148.378,46.849 149.181,46.849 154.515,41.515 154.515,40.296 156.852,37.959 157.385,38.492 157.385,43.09 157.055,43.42 156.953,43.42 156.445,42.912 155.709,42.912 151.328,47.293 151.328,48.624 148.466,48.624 148.266,48.424
  region net VIN: 156.852,40.702 156.852,44.766 156.348,45.27 156.348,47.869 157.029,48.551 158.376,48.551 158.68,48.246 158.68,45.325 158.35,44.995 158.35,41.947 159.595,40.702
  region net +4.5V~18V: 170.085,36.638 169.425,37.299 166.885,37.299 166.173,36.587 163.913,36.587 163.075,35.749 163.075,33.768 164.141,32.701 169.348,32.701 170.085,33.438
  region net NetF2_1: 177.527,40.931 177.527,41.388 177.019,41.896 168.586,41.896 167.443,40.753 167.443,38.975 167.901,38.518 176.41,38.518 177.553,39.661
  region net VIN: 165.894,41.058 157.207,41.058 156.852,40.702 156.852,37.959 157.182,37.629 165.132,37.629 166.148,38.645 166.148,40.804
  region net NetC1_2: 157.119,49.557 156.934,49.372 156.934,48.99 157.138,48.787 159.555,48.787 161.13,47.212 164.681,47.212 165.52,48.05 165.52,50.234 164.986,50.768 160.193,50.768 159.9,50.474 159.9,50.075 159.382,49.557
  region net NetC15_2: 147.721,48.772 147.949,49 147.949,51.141 148.508,51.7 148.508,54.487 147.721,55.274 146.171,55.274 145.846,54.949 145.846,49.303 146.377,48.772
  region net +5V: 145.13,54.537 144.444,55.223 143.25,55.223 142.92,54.893 142.92,53.496 142.361,52.937 135.995,52.937 135.687,52.629 135.687,50.267 136.09,49.864 139.44,49.864 140.916,51.339 143.093,51.339 143.483,50.949 144.511,50.949 145.13,51.568
  region net GND: 131.61,38.848 132.164,39.403 132.435,39.132 132.668,39.132 132.668,38.802 132.36,38.494 131.564,38.494
  pour cut-out: 229.043,37.078 193.001,37.078 192.975,37.052 192.975,127.705 229.191,127.705
  region net VCC: 165.596,114.759 165.951,115.114 165.951,116.892 165.815,117.029 158.141,117.029 156.91,115.789 153.956,115.789 153.956,111.466 154.619,110.806 155.971,110.806 158.311,113.146 161.227,113.159 162.827,114.759
  region net VCC: 164.894,68.808 165.24,69.154 165.24,69.623 165.05,69.814 161.468,69.814 160.744,70.537 158.357,70.537 157.156,71.725 157.156,72.257 154.787,74.625 154.14,74.625 152.973,73.458 152.973,70.522 153.309,70.186 156.6,70.186 157.978,68.808
Bottom Layer:
  pour cut-out: 229.043,37.027 193.001,37.027 192.975,37.002 192.975,127.705 229.191,127.705

## Silkscreen, mask and mechanical layers (free items; w line width, h text height)
Top Overlay:
  text "P2" at 132.135,134.319 h2
  text "P5" at 114.019,134.303 h2
  text "P4" at 119.613,134.297 h2
  text "P3" at 125.836,134.297 h2
  text "P1" at 138.46,134.28 h2
  text "POWER" at 142.244,134.28 h2
  text "WF_2G" at 85.734,133.947 h2
  text "WF_5G" at 92.841,133.947 h2
  text "GBE_0" at 99.751,133.947 h2
  text "GBE_1" at 106.32,133.947 h2
  text "HLK-AX3000-KIT" at 157.182,133.107 h3
  text "MDC" at 79.223,125.578 h2
  text "MDIO" at 79.223,123.317 h2
  text "N1" at 149.587,119.747 h1
  text "G" at 79.1,119.275 h2
  text "N4" at 89.034,119.264 h1
  text "PWM0" at 78.197,115.412 h2
  text "GPIO_WPS" at 79.031,113.281 h2
  text "SPI1_MISO" at 79.223,110.947 h2
  text "SPI1_MOSI" at 79.223,108.458 h2
  text "SPI1_CLK" at 79.223,106.197 h2
  text "SPI1_CS" at 79.202,103.628 h2
  text "SPI2_CS" at 79.223,101.041 h2
  text "SPI2_HOLD" at 79.223,98.603 h2
  text "SPI2_WP" at 79.223,96.368 h2
  text "SPI2_CLK" at 79.238,93.77 h2
  text "SPI2_MISO" at 79.223,91.034 h2
  text "SPI2_MOSI" at 79.223,88.189 h2
  text "SYS_WATCHDOG" at 79.223,85.75 h2
  text "SYSTRSTB" at 79.223,83.515 h2
  text "PCIE_PERESET_N" at 79.223,80.71 h2
  text "USB_VBUS" at 79.223,78.283 h2
  text "PCIE_CKN/NC" at 79.223,75.514 h2
  text "PCIE_CKP/NC" at 79.223,73.177 h2
  text "N3" at 86.03,69.926 h1
  text "1.8V" at 136.322,68.377 h1
  text "3.3V" at 136.322,67.234 h1
  text "T" at 78.442,66.255 h3
  text "N2" at 149.587,66.255 h1
  text "R" at 78.467,63.918 h3
  text "G" at 78.289,61.276 h3
  text "GND" at 77.984,59.117 h2
  text "VCC_LED" at 148.488,57.887 h2
  text "GND" at 133.477,57.353 h1.5
  text "3.3V" at 78.105,56.464 h2
  text "GND" at 166.776,55.194 h1.5
  text "GND" at 77.876,54 h2
  text "USB_5V" at 131.267,53.823 h1.5
  text "VCC_M" at 149.53,53.619 h1.5
  text "12V" at 97.326,52.17 h2
  text "GND" at 101.076,52.047 h2
  text "5V" at 106.886,52.006 h2
  text "GND" at 109.44,52.006 h2
  text "U_5V" at 79.934,48.438 h2 r90
  text "LDO_LED" at 94.158,45.568 h2
  text "GPIO_RST" at 83.541,38.303 h2
  text "SYS_RST" at 97.336,38.303 h2
  text "USB_5V_LED" at 140.589,35.992 h2
  text "USB-TTL" at 75.692,35.382 h2
  text "DC12V" at 180.677,31.253 h2
  text "V1.0 241205" at 209.55,29.464 h3
Bottom Overlay:
  text "MDC" at 82.263,125.578 h2
  text "GPIO33" at 105.486,125.578 h2
  text "GPIO51" at 121.539,125.578 h2
  text "MDIO" at 82.852,123.317 h2
  text "GPIO24" at 105.486,123.317 h2
  text "GPIO50_MDC" at 121.539,122.984 h2
  text "G" at 79.577,118.77 h2
  text "G" at 105.486,118.77 h2
  text "G" at 121.539,118.77 h2
  text "PWM0" at 83.539,115.175 h2
  text "GPIO35" at 105.486,115.175 h2
  text "GPIO47" at 121.539,115.175 h2
  text "GPIO_WPS" at 87.313,113.007 h2
  text "GPIO32" at 105.486,113.007 h2
  text "GPIO45" at 121.539,113.007 h2
  text "SPI1_MISO" at 87.685,110.947 h2
  text "GPIO28" at 105.486,110.947 h2
  text "GPIO43" at 121.539,110.947 h2
  text "GPIO26" at 105.486,108.808 h2
  text "SPI1_MOSI" at 87.762,108.601 h2
  text "JTAG_TCK" at 121.539,108.458 h2
  text "GPIO23" at 105.486,106.464 h2
  text "SPI1_CLK" at 86.715,106.269 h2
  text "JTAG_TDO" at 121.539,106.197 h2
  text "GPIO34" at 105.486,103.919 h2
  text "JTAG_TDI" at 121.539,103.852 h2
  text "SPI1_CS" at 85.58,103.718 h2
  text "GPIO19" at 105.486,101.448 h2
  text "JTAG_TMS" at 121.539,101.321 h2
  text "SPI2_CS" at 85.58,101.194 h2
  text "GPIO38" at 105.486,98.85 h2
  text "JTAG_TRSTN" at 121.539,98.732 h2
  text "SPI2_HOLD" at 88.066,98.495 h2
  text "GPIO28" at 121.539,96.495 h2
  text "SPI0_CS" at 105.486,96.067 h2
  text "SPI2_WP" at 86.667,96.008 h2
  text "GPIO29" at 121.539,93.904 h2
  text "SPI2_CLK" at 87.274,93.777 h2
  text "SPI0_MISO" at 105.486,93.701 h2
  text "GPIO30" at 121.539,91.389 h2
  text "SPI0_MOSI" at 105.486,91.296 h2
  text "SPI2_MISO" at 87.685,91.093 h2
  text "GPIO31" at 121.539,88.9 h2
  text "SPI0_CLK" at 105.486,88.621 h2
  text "SPI2_MOSI" at 87.685,88.369 h2
  text "GPIO22" at 105.503,86.07 h2
  text "GPIO17/I2C_SDA" at 121.49,85.881 h2
  text "SYS_WATCHDOG" at 93.418,85.764 h2
  text "SYSTRSTB" at 87.666,83.573 h2
  text "RSTIN_N" at 105.171,83.066 h2
  text "SYS_RESET_N" at 121.727,83.043 h2
  text "GPIO11" at 121.49,80.867 h2
  text "GPIO40" at 104.767,80.643 h2
  text "PCIE_PERESET_N" at 93.927,80.612 h2
  text "GPIO12" at 121.585,78.549 h2
  text "DVDD1.8V" at 105.507,78.49 h2
  text "USB_VBUS" at 87.707,78.232 h2
  text "PCIE_CKN/NC" at 90.218,75.54 h2
  text "PCIE_CKN" at 105.486,75.54 h2
  text "USB2_1_DP" at 121.539,75.514 h2
  text "USB2_1_DM" at 121.66,73.105 h2
  text "PCIE_CKP/NC" at 90.12,72.746 h2
  text "PCIE_CKP" at 105.486,72.746 h2
  text "RM65" at 86.979,70.289 h3
  text "RM69" at 120.836,69.832 h3
  text "RM68" at 104.783,69.604 h3
  text "T" at 79.673,66.94 h3
  text "R" at 79.648,64.604 h3
  text "G" at 79.826,61.962 h3
  text "GND" at 81.915,59.258 h2
  text "3.3V" at 81.661,57.201 h2
  text "GND" at 81.803,53.932 h2
  text "U_5V" at 82.448,50.902 h2
Mechanical 1:
  lines w0.001: 79.089,137.053 223.092,137.053 ; 79.095,28.053 223.093,28.053 ; 227.093,32.053 227.093,133.047
  lines w0.02: 75.089,133.053 cw(c79.089,133.053) 79.089,137.053 ; 75.09,32.058 ccw(c79.09,32.058) 79.09,28.058 ; 223.092,137.048 cw(c223.092,133.048) 227.092,133.048 ; 223.093,28.053 ccw(c223.093,32.053) 227.093,32.053

## Dimensions
223.092,137.048 to 223.093,28.053 on Top Overlay
75.089,133.053 to 227.092,133.048 on Top Overlay